# Altium PCB nrf52840_TM7711_S.PcbDoc
Units mil, origin at the board's own origin, x right, y up, seen from the top; angles counter-clockwise.
Board outline 995.28 x 996.27 mil, 4 copper layers (Top Layer, Mid-Layer 1, Mid-Layer 2, Bottom Layer), stack 40.8 mil thick; 52 components, 70 nets, 209 pads, 63 vias.
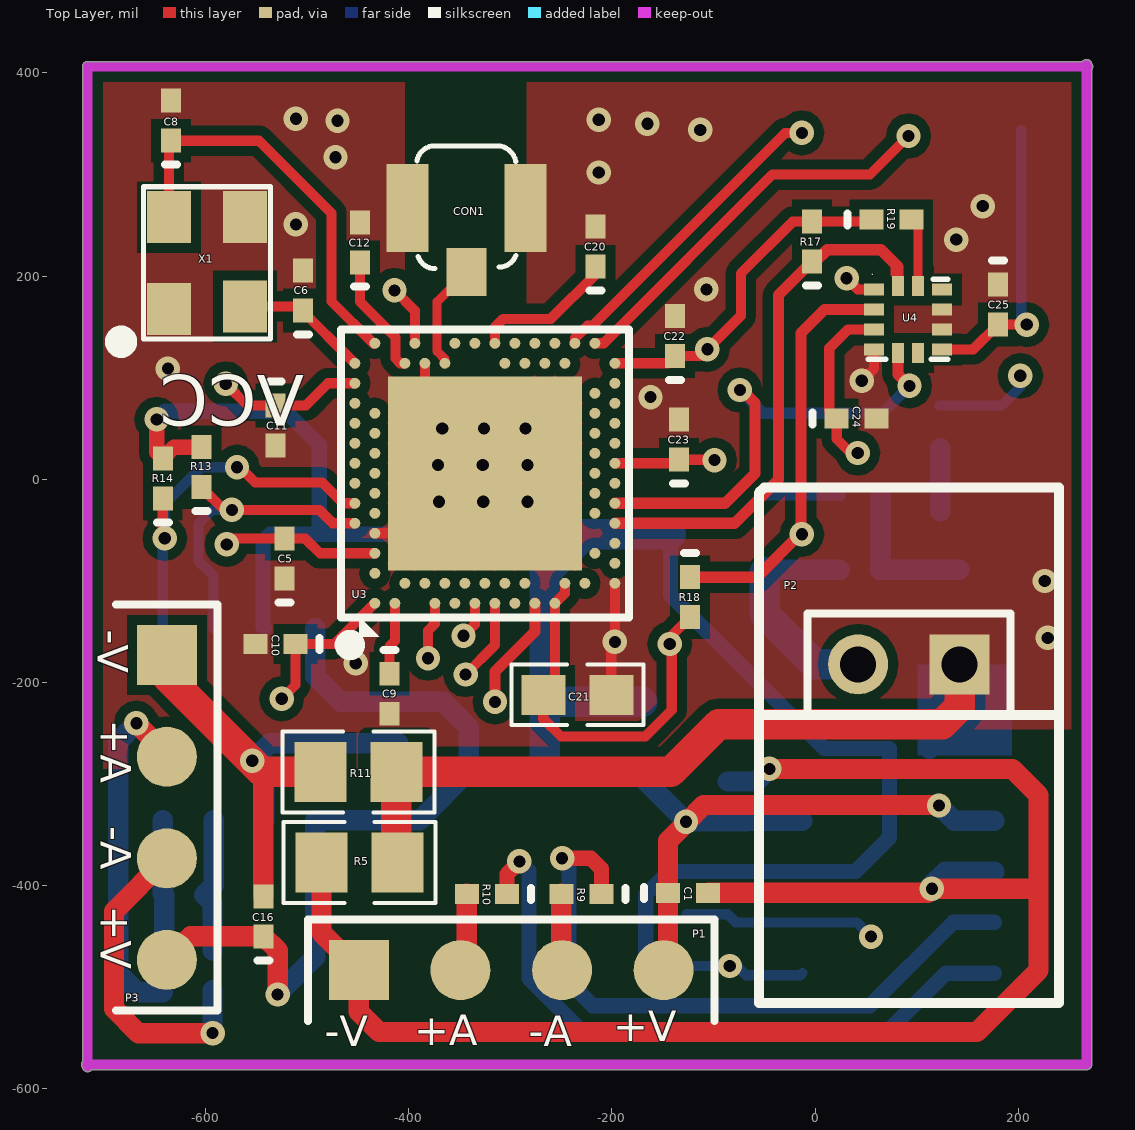
[diagram p0: Top Layer view]
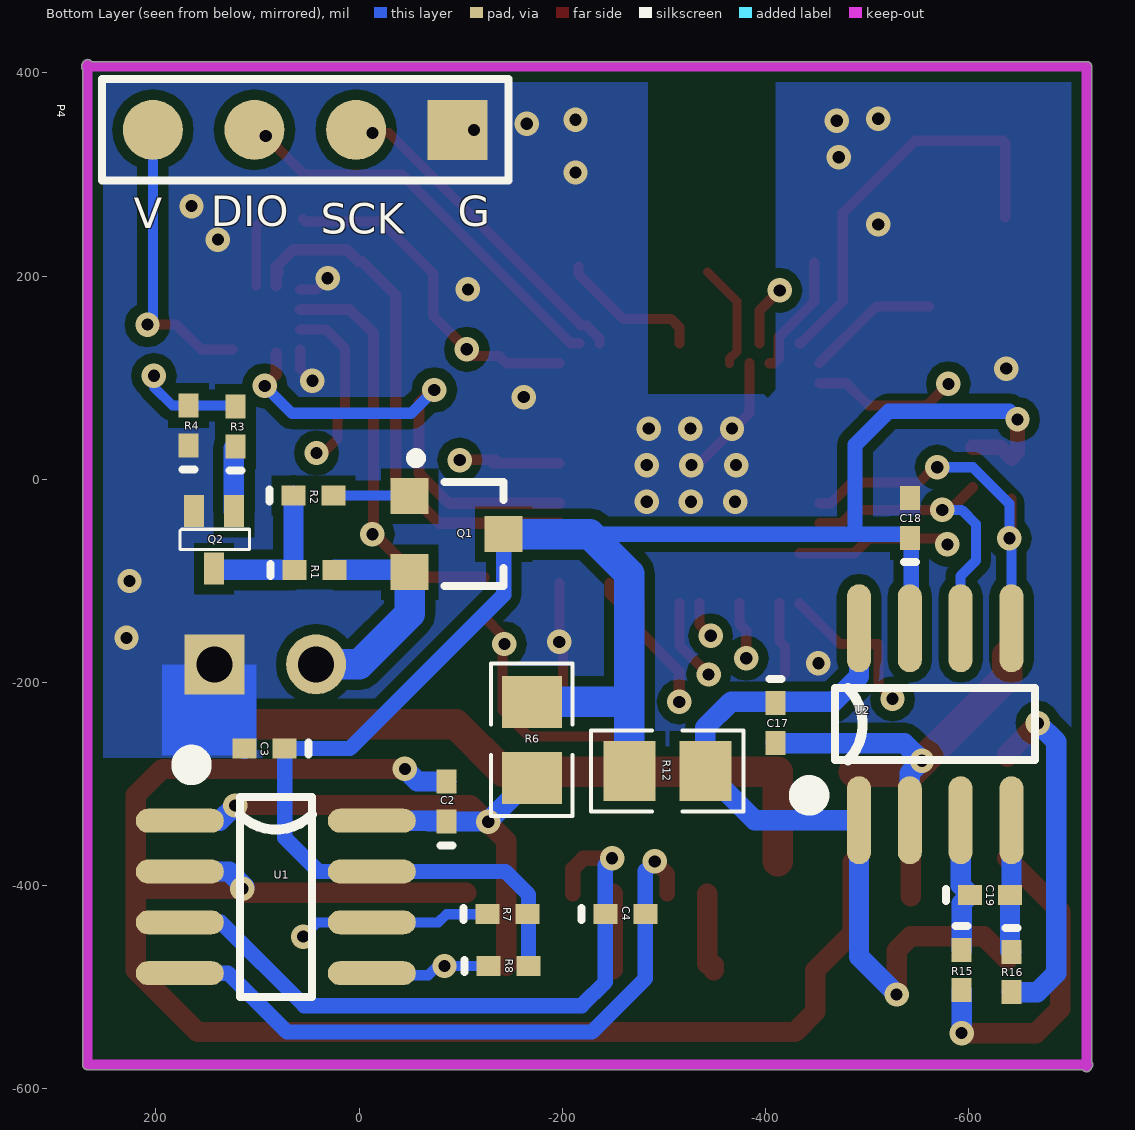
[diagram p1: Bottom Layer view, seen from below]
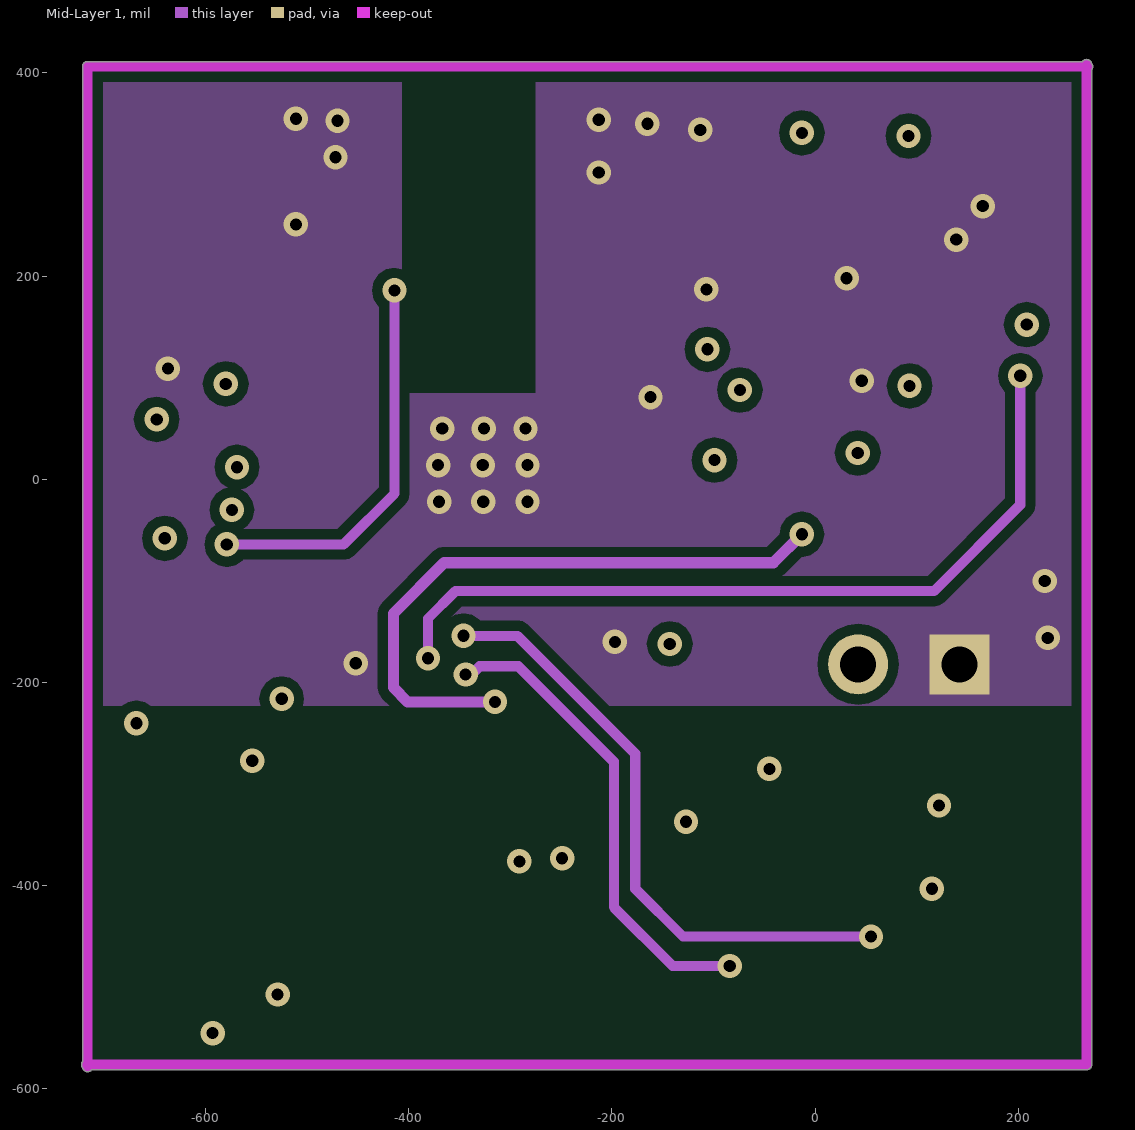
[diagram p2: Mid-Layer 1]
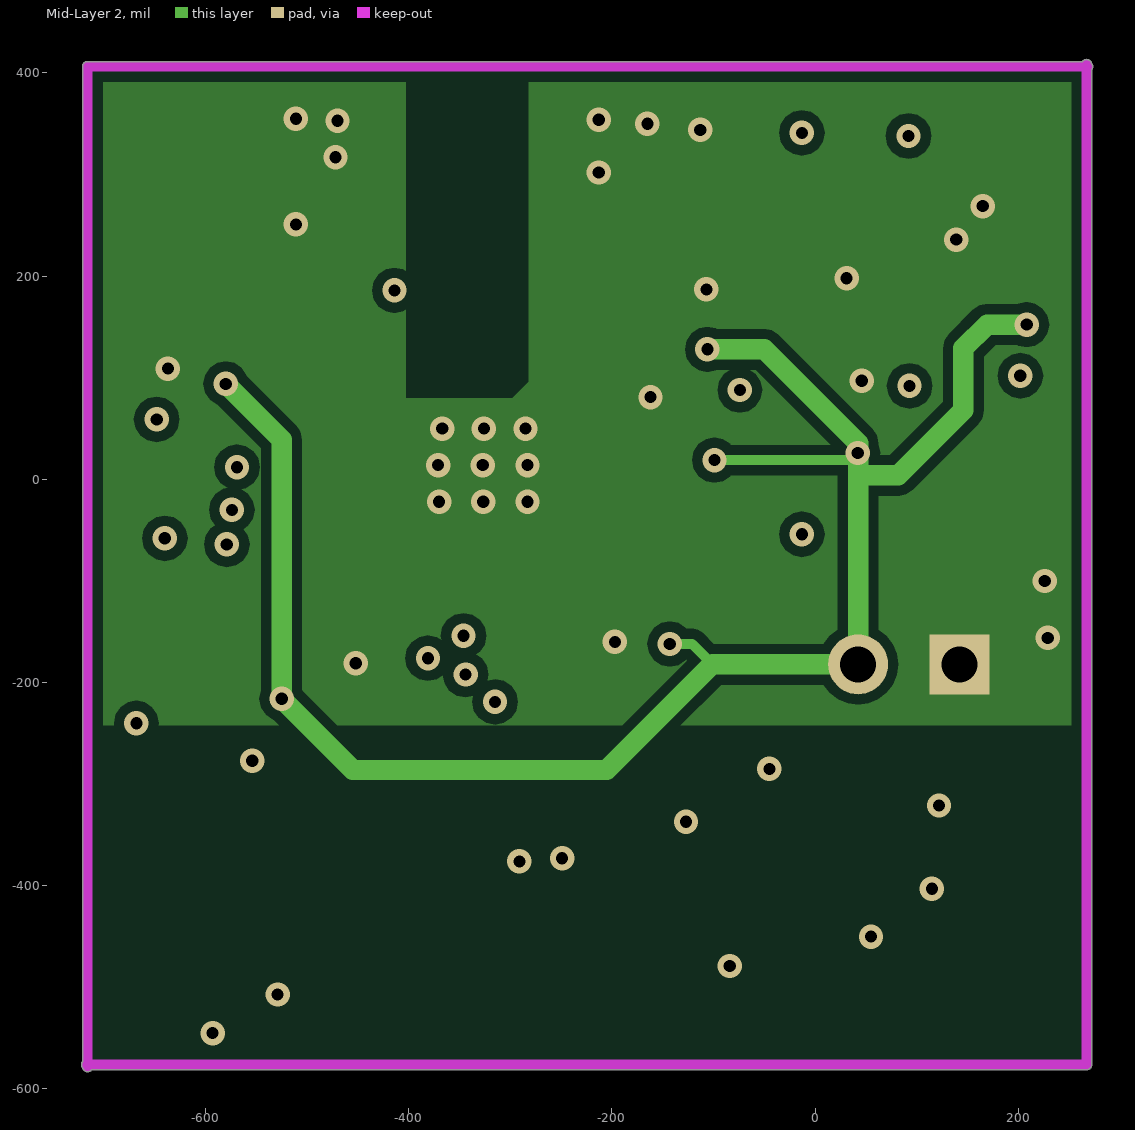
[diagram p3: Mid-Layer 2]

## Layer stack, top to bottom
Top Layer: signal copper 1.4
Dielectric: core 10, FR-4, Dk 4.2
Mid-Layer 1: signal copper 1.4
Dielectric: prepreg 12.6, FR-4, Dk 4.8
Mid-Layer 2: signal copper 1.4
Dielectric: core 12.6, FR-4, Dk 4.8
Bottom Layer: signal copper 1.4

## Board outline
-720.87,-579.19 cw(c-717,-576) -721.01,-572.99 -721.01,406.25 cw(c-716,406.25) -716,411.27 263.24,411.27 cw(c267.25,408.25) 272.12,409.44 cw(c268.25,406.25) 273.27,406.25 cw(c268.25,406.25) 272.27,403.25 272.27,-576 cw(c267.25,-576) 267.25,-581.02 -711.99,-581.02 cw(c-716,-578)

## Design rules (kind name [scope] priority, off if disabled: settings)
Clearance [All] p1: gap=7
ComponentClearance [All] p1 off: gap=10 collisioncheckmode=3 verticalgap=10 showdistances=FALSE
Height [All] p1 off: minheight=0 maxheight=1000 prefheight=500
MinimumSolderMaskSliver [All] p1 off: minsoldermaskwidth=10
NetAntennae [All] p1 off: netantennaetolerance=0
PolygonConnect [All] p1: connectstyle=Direct reliefconductorwidth=10 reliefentries=4 polygonreliefangle="90 Angle"
RoutingVias [All] p1: holewidth=28 width=50 viastyle="Through Hole" minholewidth=28 minwidth=50 maxholewidth=28 maxwidth=50
SilkToSilkClearance [All] p1 off: silktosilkclearance=10
SilkscreenOverComponentPads SilkToSolderMaskClearance [IsPad] p1 off: minsilkscreentomaskgap=10
SolderMaskExpansion [All] p1: expansion=4
Width [All] p1: maxlimit=100 minlimit=1 preferedwidth=10 midlayer1_minwidth=10 midlayer2_minwidth=10 minimp=50.000000 maximp=50.000000 favimp=50.000000
22 further rules are at their usual default settings.

## Components (designator, comment, footprint, x,y, rotation, side; value= is the part's Value field where it differs from the comment)
C1 "0.1u" 0402-a -125,-407 r0 top
C2 "0.1u" 0402-a -86,-317 r90 bottom
C3 "0.1u" 0402-a 93,-265 r0 bottom
C4 "0.1u" 0402-a -262,-428 r180 bottom
C5 "1.0μF" 0402-A -522,-78 r90 top
C6 "12pF" 0402-A -504,186 r90 top
C8 "12pF" 0402-A -634,353 r90 top
C9 "100nF" 0402-A -419,-211 r270 top
C10 "1.0μF" 0402-a -531,-162 r180 top
C11 "100nF" 0402-a -531,53 r270 top
C12 "100pF" 0402-A -448,233 r90 top
C16 "0.1u" 0402-a -543,-430 r90 top
C17 "0.1u" 0402-a -410,-240 r270 bottom
C18 "0.1u" 0402-a -542,-38 r90 bottom
C19 "0.1u" 0402-a -621,-409 r180 bottom
C20 "820pF" 0402-A -216,229 r90 top
C21 "4.7μF" 0603-1 -234,-212 r0 top
C22 "100nF" 0402-a -138,141 r90 top
C23 "100nF" 0402-a -134,39 r90 top
C24 "0.1uF" 0402-a 41,60 r0 top
C25 "1uF" 0402-a 180,172 r270 top
CON1 "SMA/UFLR" IPX_U.FL -343,267 r270 top
P1 "Header 4" HDR1X4 -449,-483 r0 top
P2 "Header 2" BAT 240,-232 r180 top
P3 "Header 4" HDR1X4 -638,-173 r270 top
P4 "Header 4" HDR1X4 -97,344 r0 bottom
Q1 "VIC1121" SOT-23 -96,-54 r270 bottom
Q2 "LMBT3904" SOT523 143,-84 r0 bottom
R1 "1M" 0402-A 44,-89 r180 bottom
R2 "1K" 0402-A 45,-16 r180 bottom
R3 "100K" 0402-A 121.69,52 r90 bottom
R4 "1M" 0402-A 168,53 r90 bottom
R5 "0R" 0805-1 -411,-377 r180 top
R6 "0R" 0805-1 -170,-219 r270 bottom
R7 "10k" 0402-A -146,-428 r180 bottom
R8 "10k" 0402-A -147,-479 r180 bottom
R9 "1k" 0402-a -230,-408 r180 top
R10 "1k" 0402-a -323,-408 r180 top
R11 "0R" 0805-1 -412,-288 r180 top
R12 "0R" 0805-1 -266,-287 r180 bottom
R13 "10k" 0402-A -604,12 r90 top
R14 "10k" 0402-A -642,1 r90 top
R15 "1k" 0402-a -593,-483 r270 bottom
R16 "1k" 0402-a -642,-485 r270 bottom
R17 "10K" 0402-A -3,234 r90 top
R18 "10K" 0402-A -123,-116 r270 top
R19 "10K" 0402-A 75,256 r0 top
U1 "TM7711" SO8_n 82,-411 r180 bottom
U2 "TM7711" SO8_N -567,-241 r90 bottom
U3 "nRF52840-QIAA" AQFN50P700X700X85_HS-74N -325,6 r90 top
U4 "bma250e" bma250e 58,187 r0 top
X1 "32MHz" SMD3225 -636,258 r270 top

## Footprints (in the part's own frame and the unit in brackets; to place one, negate y for a bottom-side part, rotate by r counter-clockwise, add the part's x,y. Pads: shape width x height; smd on the part's side, far side on the other; paste and mask are expansions set on the pad)
0402-a [mm] "Chip Inductor; Body 1 x 0.5 mm (LxW typ)"
  rect 0.6x0.5 smd: 1(-0.5,0) 2(0.5,0)
  silkscreen extent -1.1,-0.15 -1.1,0.15
0402-A [mm] "Chip Inductor; Body 1 x 0.5 mm (LxW typ"
  rect 0.6x0.5 smd: 1(-0.5,0) 2(0.5,0)
  silkscreen extent -1.1,-0.15 -1.1,0.15
0603-1 [mm]
  rect 1.1x1 smd: 1(-0.85,0) 2(0.85,0)
  silkscreen extent -1.65,-0.76 1.65,0.76, body extent -1.14,-0.38 1.14,0.38, height 1
0805-1 [mm]
  rect 1.3x1.5 smd: 1(0,0) 2(1.9,0)
  silkscreen extent -0.96,-1.02 2.85,1.02
AQFN50P700X700X85_HS-74N [mm]
  rect 4.85x4.85 smd mask+0.05: 74(0,0)
  round 0.275 smd paste+0.012 mask+0.05: A8(-1.25,3.25) A10(-0.75,3.25) A12(-0.25,3.25) A14(0.25,3.25) A16(0.75,3.25) A18(1.25,3.25) A20(1.75,3.25) A22(2.25,3.25) A23(2.75,3.25) AA24(3.25,-2.25) AB2(-2.75,-2.5) AC5(-2,-2.75) AC9(-1,-2.75) AC11(-0.5,-2.75) AC13(0,-2.75) AC15(0.5,-2.75) AC17(1,-2.75) AC19(1.5,-2.75) AC21(2,-2.75) AC24(3.25,-2.75) AD2(-2.75,-3.25) AD4(-2.25,-3.25) AD6(-1.75,-3.25) AD8(-1.25,-3.25) AD10(-0.75,-3.25) AD12(-0.25,-3.25) AD14(0.25,-3.25) AD16(0.75,-3.25) AD18(1.25,-3.25) AD20(1.75,-3.25) AD22(2.25,-3.25) AD23(2.75,-3.25) B1(-3.25,2.75) B3(-2.5,2.75) B5(-2,2.75) B7(-1.5,2.75) B9(-1,2.75) B11(-0.5,2.75) B13(0,2.75) B15(0.5,2.75) B17(1,2.75) B19(1.5,2.75) B24(3.25,2.75) C1(-3.25,2.25) D2(-2.75,2) D23(2.75,2) E24(3.25,1.75) F2(-2.75,1.5) F23(2.75,1.5) G1(-3.25,1.25) H2(-2.75,1) H23(2.75,1) J1(-3.25,0.75) J24(3.25,0.75) K2(-2.75,0.5) L1(-3.25,0.25) L24(3.25,0.25) M2(-2.75,0) N1(-3.25,-0.25) N24(3.25,-0.25) P2(-2.75,-0.5) P23(2.75,-0.5) R1(-3.25,-0.75) R24(3.25,-0.75) T2(-2.75,-1) T23(2.75,-1) U1(-3.25,-1.25) U24(3.25,-1.25) V23(2.75,-1.5) W1(-3.25,-1.75) W24(3.25,-1.75) Y2(-2.75,-2) Y23(2.75,-2)
  silkscreen extent -4.42,-3.6 3.6,3.6, body extent -3.55,-3.55 3.55,3.55, height 0.85
BAT [mm]
  rect 1.5x1.5 hole 0.9: 1(2.48,-1.27)
  round 1.5 hole 0.9: 2(5.02,-1.27)
  silkscreen extent 0,-2.54 7.5,7.2
bma250e [mm]
  rect 0.5x0.3 smd: 1(0,0) 2(0,-0.5) 3(0,-1) 4(0,-1.5) 7(1.7,-1.5) 8(1.7,-1) 9(1.7,-0.5) 10(1.7,0)
  rect 0.3x0.5 smd: 5(0.6,-1.59) 6(1.1,-1.59) 11(1.1,0.09) 12(0.6,0.09)
  silkscreen extent -0.15,-1.75 1.85,0.25
HDR1X4 [mm] "Connector; Header; 4 Position"
  rect 1.5x1.5 smd: 1(0,0)
  round 1.5 smd: 2(2.54,0) 3(5.08,0) 4(7.62,0)
  silkscreen extent -1.27,-1.27 8.89,1.27
IPX_U.FL [mm]
  rect 1.2x1 smd: 1(1.6,0)
  rect 2.2x1.05 smd: 2(0,-1.475) 3(0,1.475)
  silkscreen extent -1.55,-1.24 1.51,1.23
SMD3225 [mm]
  rect 1.3x1.1 smd: 1(0,0) 2(2.3,0) 3(2.23,1.9) 4(0,1.9)
  silkscreen extent -0.76,-1.32 3.24,2.54
SO8_n [mm] "SOIC, 8-Leads, Body 4.9x3.9mm, Pitch 1.27mm, IPC Medium Density"
  oval 2.2x0.6 smd: 1(-2.4,1.905) 2(-2.4,0.635) 3(-2.4,-0.635) 4(-2.4,-1.905) 5(2.4,-1.905) 6(2.4,-0.635) 7(2.4,0.635) 8(2.4,1.905)
  silkscreen extent -2.23,-2.5 0.9,3.42, body extent -2,-2.5 2,2.5, height 1.75
SO8_N [mm] "SOIC, 8-Leads, Body 4.9x3.9mm, Pitch 1.27mm, IPC Medium Density"
  oval 2.2x0.6 smd: 1(-2.4,1.905) 2(-2.4,0.635) 3(-2.4,-0.635) 4(-2.4,-1.905) 5(2.4,-1.905) 6(2.4,-0.635) 7(2.4,0.635) 8(2.4,1.905)
  silkscreen extent -1.9,-2.5 0.9,3.28, body extent -2.79,-1.64 1.21,3.36, height 1.75
SOT523 [mm]
  rect 0.5x0.8 smd: 1(-0.5,-1.34) 2(0.5,-1.34) 3(0,0.1)
  silkscreen extent -0.89,-0.89 0.85,-0.38
SOT-23 [mm]
  rect 0.9x0.95 smd: 1(-0.95,-1.175) 2(0.95,-1.175) 3(0,1.175)
  silkscreen extent -2.03,-1.14 1.3,1.18

## Part data
C1 C2 C3 C4 C16 C17 C18 C19: library part C0402-N.C., "Not mounted"
C5 C10: library part C0603-1?, "Capacitor, X7R, ±10%"
C6 C8: library part C0402-12p, "Capacitor, NP0, ±2%"
C9 C11 C22 C23: library part C0402-100n, "Capacitor, X7R, ±10%"
C12: library part C0402-100p, "Capacitor, NP0, ±5%"
C20: library part C0402-820p, "Capacitor, NP0, ±5%"
C21: library part C0603-4μ7-6.3V, "Capacitor, X7R, ?"
C24 C25: library part C0402-0.5p, "Capacitor, NP0, ±10%"
P1 P3 P4: "Header, 4-Pin"
P2: "Header, 2-Pin"
Q1: library part MOSFET-P, "P-Channel MOSFET"
Q2: library part 2N3904, "NPN General Purpose Amplifier"
R1 R2 R3 R4 R5 R6 R7 R8 R9 R10 R11 R12 R13 R14 R15 R16: library part R-10K, "resistor"
R17 R18 R19: library part Res1, "Resistor"
U3: library part nRF52840-QIAAD0, "Multi-protocol Bluetooth Low Energy, IEEE 802.15.4, ANT and 2.4GHz proprietary system-on-chip"
X1: library part XTAL_SMD2016_32MHz_8pF_General, "XTAL SMD 2016, 32MHz, Cl=8pF, Total Tol: ±40ppm"

## Via types
v1: diameter 24, hole 12, Top Layer to Bottom Layer, 63 vias

## Nets (pads, with @x,y where several pads share a name; then routed paths per layer and width w, separated by ;. In a path a pad name is that pad's centre, name@x,y a point inside that pad or via, vN(x,y) a via of type N, cw(c..) or ccw(c..) an arc to the next point about the centre after c; other vN are vias at no path point)
DEC1: C9.1 U3.C1 | length 71.6
  Top Layer w10: C9.1 -419,-164.42 -413.58,-159 U3.C1
DEC3: C12.1 U3.D23 | length 120
  Top Layer w10: C12.1 -448,175 -413,140 -413,119 -408.27,114.27 U3.D23
DEC4_6: C5.2 U3.B5 U3.E24 | length 600.1
  Top Layer w10: v1(-579,-64) -573.31,-58.31 C5.2 -501.69,-58.31 -487.26,-72.74 U3.B5 ; v1(-414,186) -393.9,165.9 U3.E24
  Mid-Layer 1 w10: v1(-579,-64) -464,-64 -414,-14 v1(-414,186)
GND: C3.2 C5.1 C6.2 C8.2 C9.2 C10.2 C11.2 C12.2 C18.2 C20.2 C21.2 C22.2 C23.2 C24.2 C25.1 CON1.2 CON1.3 P2.1 P4.1 Q2.2 R4.1 R5.1 R11.1 U3.74 U3.AD2 U3.B7 U3.F23 U4.1 U4.4 U4.8 U4.9 X1.2 X1.4 | length 1166.5
  Top Layer w10: U3.B7 U3.74@-384.06,-53.06 ; U3.F23 -384.06,65.06 U3.74 ; C21.2 -200.54,-163.44 v1(-197,-160) U3.AD2 ; v1(31,198) 42,187 U4.1 ; v1(46,97) 58,109 U4.4
  Top Layer w30: R5.1@-412,-376 R11.1 -142,-288 -95,-241 125,-241 142.36,-223.64 P2.1
  Bottom Layer w20: C3.2 142.36,-235.32 P2.1
  other v1: -452,-181 229,-156 226,-100 -370,-22 -326.5,-22 -283,-22 -371,14 -327,14 -283,14 -367,50 -326,50 -285,50 -162,81 -637,109 -107,187 139,236 -511,251 165,269 -213,302 -472,317 -113,344 -165,350 -470,353 -213,354 -511,355
NetC4_1: C4.1 R9.1 U1.3 | length 654.5
  Top Layer w15: v1(-249,-373) -220.63,-373 -210.32,-383.31 R9.1
  Bottom Layer w15: v1(-249,-373) -242.32,-379.69 C4.1 -242.32,-494.69 -219,-518 54,-518 136,-436 U1.3
NetC4_2: C4.2 R10.1 U1.4 | length 660.3
  Top Layer w15: R10.1 -303.32,-388.31 v1(-291,-376)
  Bottom Layer w15: v1(-291,-376) -281.69,-385.31 C4.2 -281.69,-491.31 -229,-544 71,-544 129,-486 U1.4
NetC19_1: C19.1 R15.1 U2.3 | length 135.1
  Bottom Layer w20: R15.1 -593,-417.31 C19.1 -592,-399.69 U2.3
NetC19_2: C19.2 R16.1 U2.4 | length 130.9
  Bottom Layer w20: R16.1 -640.69,-464 C19.2 -642,-407.69 U2.4
NetC20_1: C20.1 U3.N24 | length 144
  Top Layer w10: U3.N24 -315.16,149.84 -307,158 -260,158 -216,202 C20.1
NetQ1_1: Q1.1 R2.2 | length 74.5
  Bottom Layer w10: Q1.1@-49.14,-16 R2.2
NetQ2_1: Q2.1 R3.1 | length 61.9
  Bottom Layer w20: Q2.1 R3.1@123.32,30.69
NetQ2_3: Q2.3 R1.1 R2.1 | length 150.3
  Bottom Layer w20: R1.1 Q2.3@141.94,-89 ; R1.1@64.68,-88 R2.1
NetR19_2: R19.2 U4.11 | length 68.2
  Top Layer w9: R19.2 101.31,249.38 U4.11
P0.04/AIN2: U3.J1
P0.05/AIN3: U3.K2
P0.06: R7.1 U1.6 U3.L1 | length 828.6
  Top Layer w10: v1(-346,-154) -334.84,-142.84 U3.L1
  Mid-Layer 1 w10: v1(-346,-154) -293,-154 -177,-270 -177,-403 -130,-450 v1(55,-450)
  Bottom Layer w10: R7.1 -86,-428 -78,-436 U1.6 41,-436 v1(55,-450)
P0.07: U3.M2
P0.08: R8.1 U1.5 U3.N1 | length 670.7
  Top Layer w10: v1(-344,-192) -315.16,-163.16 U3.N1
  Mid-Layer 1 w10: v1(-344,-192) -338,-192 -330,-184 -292,-184 -198,-278 -198,-421 -140,-479 v1(-84,-479)
  Bottom Layer w10: R8.1 v1(-84,-479) -77,-479 -68,-488 -14.49,-488 U1.5
P0.09/NFC1: U3.L24
P0.10/NFC2: U3.J24
P0.11: U3.T2
P0.12: R18.1 U3.U1 U4.2 | length 1133.4
  Top Layer w11: v1(-315,-219) -315,-189 -275.79,-149.79 U3.U1 ; R18.1 -57.32,-96.31 v1@-14,-53 ; v1(-13,-54) v1@-14,-53 ; U4.2 9.32,167.31 -14,144 v1@-14,-53
  Mid-Layer 1 w11: v1(-315,-219) -401,-219 -415,-205 -415,-132 -365,-82 -41,-82 v1(-13,-54)
P0.13: R17.1 U3.AD8 U4.12 | length 530.4
  Top Layer w11: U3.AD8 -79.21,-43.21 -36,0 -36,181.31 R17.1 0.32,214.31 12,226 65,226 79.9,211.1 ; 79.9,202.77 79.9,211.1 ; U4.12 81.62,209.38 79.9,211.1
P0.14: U3.AC9
P0.15: U3.AD10 U4.5 | length 464.5
  Top Layer w11: U3.AD10 -88.53,-23.53 -59,6 -59,75 -72,88 v1(-74,88) ; U4.5 81.62,103.38 v1(93,92)
  Bottom Layer w11: v1(-74,88) -51,65 66,65 v1(93,92)
P0.16: U3.AC11
P0.17: U3.AD12
P0.18/RESET: U3.AC13
P0.19: U3.AC15
P0.20: U3.AD16
P0.21: U3.AC17
P0.22: U3.AD18
P0.23: U3.AC19
P0.24: U3.AD20
P0.25: U3.AC21
P0.26: R3.2 R4.2 U3.G1 | length 950.2
  Top Layer w10: v1(-381,-176) -381,-149 -374.21,-142.21 U3.G1
  Mid-Layer 1 w10: v1(-381,-176) -381,-137 -354,-110 117,-110 202,-25 v1(202,102)
  Bottom Layer w10: R3.2@122.69,72.69 R4.2 183.69,72.69 202,91 v1(202,102)
P0.27: U3.H2
P1.00: U3.AD22
P1.01: U3.Y23
P1.02: U3.W24
P1.03: U3.V23
P1.04: U3.U24
P1.05: U3.T23
P1.06: U3.R24
P1.07: U3.P23
P1.08: U3.P2
P1.09: U3.R1
P1.10: U3.A20
P1.11: U3.B19
P1.12: U3.B17
P1.13: U3.A16
P1.14: U3.B15
P1.15: U3.A14
RF: CON1.1 U3.H23 | length 104.9
  Top Layer w9: U3.H23 -364.37,118.5 -372,126.13 -372,175.01 CON1.1
SWDCLK: P4.2 U3.AA24 | length 312.1
  Top Layer w10: U3.AA24 -236.42,138.89 -223.94,151.37 -219,151.37 -29.37,341 v1(-13,341)
SWDIO: P4.3 U3.AC24 | length 393.3
  Top Layer w10: U3.AC24 -208.05,133.95 -42,300 54,300 v1(92,338)
TM7711_1_A+: P1.2 R10.2 | length 73.7
  Top Layer w20: P1.2 P1.2@-349,-478 ; P1.2@-342.69,-476.69 R10.2
TM7711_1_A-: P1.3 R9.2 | length 74.3
  Top Layer w20: P1.3@-249.69,-482.31 R9.2
TM7711_1_AGND: C1.2 C2.2 P1.1 R5.2 U1.2 | length 1761.8
  Top Layer w20: R5.2 -485.8,-446.2 P1.1 -449,-524 -429,-544 159,-544 220,-483 220,-397 ; C1.2 111,-407 v1(115,-403) 214,-403 220,-397 ; v1(-45,-285) 194,-285 220,-311 220,-397
  Bottom Layer w20: C2.2 -57.31,-297.31 v1(-45,-285) ; v1@113,-401 v1(115,-403) 115,-399 128,-386 U1.2
TM7711_1_AVDD: C1.1 C2.1 P1.4 R6.2 U1.1 U1.8 | length 659.2
  Top Layer w20: P1.4@-144.68,-478.69 C1.1 -144.68,-355.69 v1@-127,-338 ; v1(-127,-337) v1@-127,-338 ; v1@122,-320.49 -109.49,-320.49 v1@-127,-338
  Bottom Layer w20: R6.2 -127.12,-336.69 C2.1 ; -68.32,-336.69 C2.1 ; U1.8 -85.32,-336 C2.1 ; v1(122,-321) 137,-336 U1.1
TM7711_2_A+: P3.2 R16.2 | length 350.6
  Top Layer w20: v1(-668,-240) -638,-270 P3.2
  Bottom Layer w20: v1(-668,-240) -686,-258 -686,-486 -667.31,-504.69 R16.2
TM7711_2_A-: P3.3 R15.2 | length 318.8
  Top Layer w20: P3.3 -690,-425 -690,-521 -666,-545 v1(-593,-545)
  Bottom Layer w20: v1(-593,-545) R15.2
TM7711_2_AGND: C16.2 C17.2 P3.1 R11.2 U2.2 | length 548.1
  Top Layer w20: C16.2 -543,-288
  Top Layer w30: P3.1 -638,-194 -544,-288 -543,-288 R11.2
  Bottom Layer w20: U2.2 -542,-289 v1(-554,-277) -536.69,-259.69 C17.2
TM7711_2_AVDD: C16.1 C17.1 P3.4 R12.2 U2.1 U2.8 | length 788.2
  Top Layer w20: P3.4 -614.68,-449.69 C16.1 -529,-463.69 v1(-529,-507)
  Bottom Layer w20: v1(-529,-507) -492,-470 U2.1 -389.29,-335.49 R12.2 -340.8,-244.2 -366,-219 -467,-219 -492,-194 U2.8
TM7711_2_DOUT: R13.1 U2.6 U3.A8 | length 313.3
  Top Layer w10: R13.1 -581.68,-30 v1(-574,-30) -488,-30 -474.79,-43.21 U3.A8
  Bottom Layer w10: U2.6 -592,-95 -607,-80 -607,-44 -593,-30 v1(-574,-30)
TM7711_2_SCK: R14.1 U2.5 U3.A10 | length 380.2
  Top Layer w10: R14.1 -642,-56 v1(-640,-58) ; v1(-569,12) -566,12 -551,-3 -485,-3 -464.47,-23.53 U3.A10
  Bottom Layer w10: U2.5 -642,-60 v1(-640,-58) -640,-24 -604,12 v1(-569,12)
VCC_TM7711: C3.1 C18.1 Q1.3 R6.1 R7.2 R8.2 R12.1 R13.2 R14.2 U1.7 U2.7 | length 1949.8
  Top Layer w15: v1(-648,59) -648,26.69 R14.2 -631,31.69 R13.2
  Bottom Layer w15: v1(-648,59) -640,67 -521,67 -488,34 -488,-52 ; U2.7 -543.32,-145.2 -543.32,-61 -536.31,-54 -227,-54 ; R6.1 R6.1@-165,-224 ; R8.2 -166.69,-408.69 -144,-386 U1.7 40,-386 73.32,-352.69 C3.1 9,-265 -142.26,-113.74 Q1.3
  Bottom Layer w30: R12.1 -266,-214 ; R6.1 -261,-219 -266,-214 ; Q1.3 -227,-54 -266,-93 -266,-214
VDD_NRF: C10.1 C11.1 C21.1 C22.1 C23.1 C24.1 C25.2 P2.2 P4.4 Q1.2 R1.2 R17.2 R18.2 R19.1 U3.A22 U3.AD14 U3.AD23 U3.B1 U3.W1 U3.Y2 U4.3 U4.7 | length 3635.8
  Top Layer w10: v1(-580,94) -558.68,72.69 C11.1 -501.32,72.69 -479.42,94.58 U3.A22 ; v1(-525,-216) -511.32,-202.31 C10.1 -473.32,-162 U3.B1 ; U3.Y2 -246.26,-112.11 U3.W1 -256.1,-200.64 C21.1 -267.46,-235.54 -250,-253 -167,-253 -141,-227 -141,-153.69 R18.2 ; U3.AD14 -131.84,15.84 C23.1@-130,17.69 ; U3.AD23 -145.05,114.27 C22.1 -112.68,121.31 v1(-106,128) -73,161 -73,202.69 -22,253.69 R17.2 53,253.69 R19.1 ; C23.1 v1@-99.32,19.31 ; v1(42,26) 35,26 21.32,39.69 C24.1 14,67.31 14,129 32.63,147.63 U4.3 ; U4.7 155.63,127.94 C25.2 v1(208.31,152.31)
  Mid-Layer 2 w10: v1@-143,-166 v1(-143,-162) -121,-162 -101,-182 ; v1(-99,19) v1@37.36,19
  Mid-Layer 2 w20: v1(-580,94) -525,39 v1(-525,-216) -455,-286 -205,-286 -101,-182 P2.2 42.36,4 ; v1(-106,128) -50,128 42.36,35.64 42.36,4 ; v1(208.31,152.31) 169.31,152.31 146,129 146,68 82,4 42.36,4
  Bottom Layer w10: P4.4 203,157.63 v1(208.31,152.31)
  Bottom Layer w20: Q1.2@-47.34,-89 R1.2
  Bottom Layer w30: Q1.2 -49.74,-132.26 0,-182 P2.2
XC1: C8.1 U3.B24 X1.1 | length 410.4
  Top Layer w10: X1.1 -636,331.31 C8.1 -547.32,333.31 -476,262 -476,175 -434.95,133.95 U3.B24
XC2: C6.1 U3.A23 X1.3 | length 131.4
  Top Layer w10: X1.3 -508.89,170.2 U3.A23
pads on no net: U3.A12 U3.A18 U3.AB2 U3.AC5 U3.AD4 U3.AD6 U3.B3 U3.B9 U3.B11 U3.B13 U3.D2 U3.F2 U4.6 U4.10

## Polygon pours and split planes (outlines as drawn)
GND on Top Layer "Bottom Layer-No Net 1" (solid, remove dead copper, pour order 16): 264,-246 -111,-246 -150,-285 -151,-285 -890,-285 -893,-288 -762,-157 -762,455 -422,455 -408,441 -404,437 -404,101 -404,67 -403,66 -401,68 -284,68 -284,453 -285,454 -212,527 399,527
GND on Bottom Layer "Bottom Layer-No Net 1" (solid, remove dead copper, pour order 20): 269,-264 259,-274 -1181,-274 -1181,278 -886,573 -736,423 -410,423 -410,88 -402,80 -398,84 -284,84 -284,493 -337,546 -316,567 315,567
GND on Mid-Layer 1 "Bottom Layer-No Net 1" (solid, remove dead copper, pour order 22): 267.25,-223 -765,-223 -786,-202 -859,-129 -859,577 -554,577 -407,430 -407,92 -402,87 -400,85 -275,85 -275,445 -261,459 400,459
GND on Mid-Layer 2 "Bottom Layer-No Net 1" (solid, remove dead copper, pour order 24): -730,422 -409,422 -404,417 -403,416 -403,80 -298,80 -283,95 -282,96 -282,472 260,472 293,439 293,-242 -733,-242 -751,-260

## Keep-outs
Keep-Out Layer:
  lines w10: -717,-576 267.25,-576 267.25,408.25 ; -716,-578 -716,406.25 268.25,406.25

## Other copper
Bottom Layer:
  rectangle net GND: 101,-272 194,-182

## Silkscreen, mask and mechanical layers (free items; w line width, h text height)
Top Overlay:
  lines w10: -55.28,-232 -55.28,-13.28 -50,-8 240,-8 240,-232
  text "VCC" at -503,53 h50
  text "V-" at -706,-191 h30 r270
  text "A+" at -703,-299 h30 r270
  text "A-" at -703,-384 h30 r270
  text "V+" at -703,-482 h30 r270
  text "V+" at -136,-553 h30
  text "A+" at -332,-557 h30
  text "V-" at -440,-558 h30
  text "A-" at -239,-558 h30
Bottom Overlay:
  lines w10: -481,-276.43 cw(c-445.57,-241) -481,-205.57 ; 46.57,-330 ccw(c82,-294.57) 117.43,-330
  text "G" at -97,249 h30
  text "DIO" at 146,249 h30
  text "V" at 222,247 h30
  text "SCK" at 38,242 h30
Top Solder:
  lines w59.06: -2330,425 -2329,1540